# Altium PCB PCB_EDR Project.pcbdoc
Units mm, origin at the board's own origin, x right, y up, seen from the top; angles counter-clockwise.
Board outline 72.49 x 57.84 mm, 2 copper layers (Top Layer, Bottom Layer); 27 components, 23 nets, 96 pads, 2 vias.
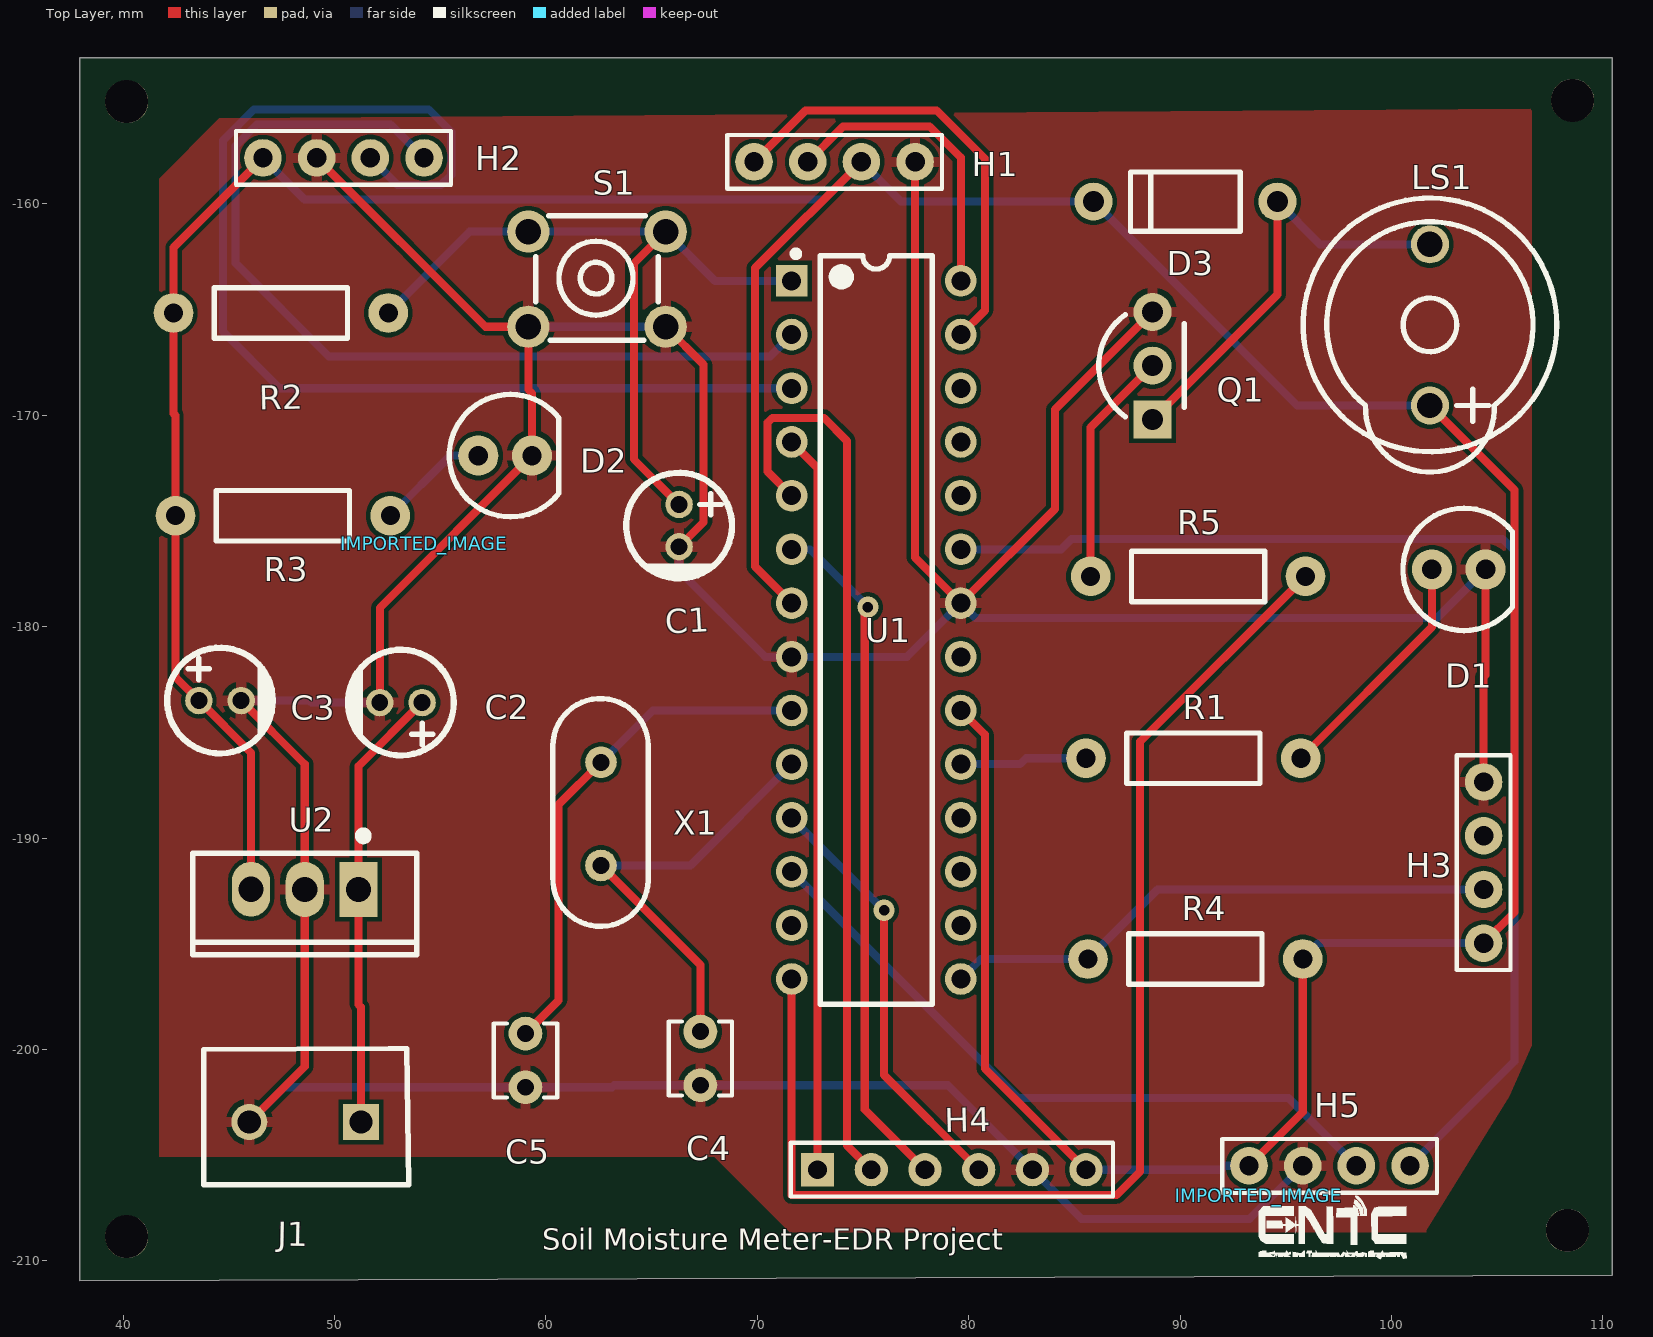
[diagram p0: Top Layer view]
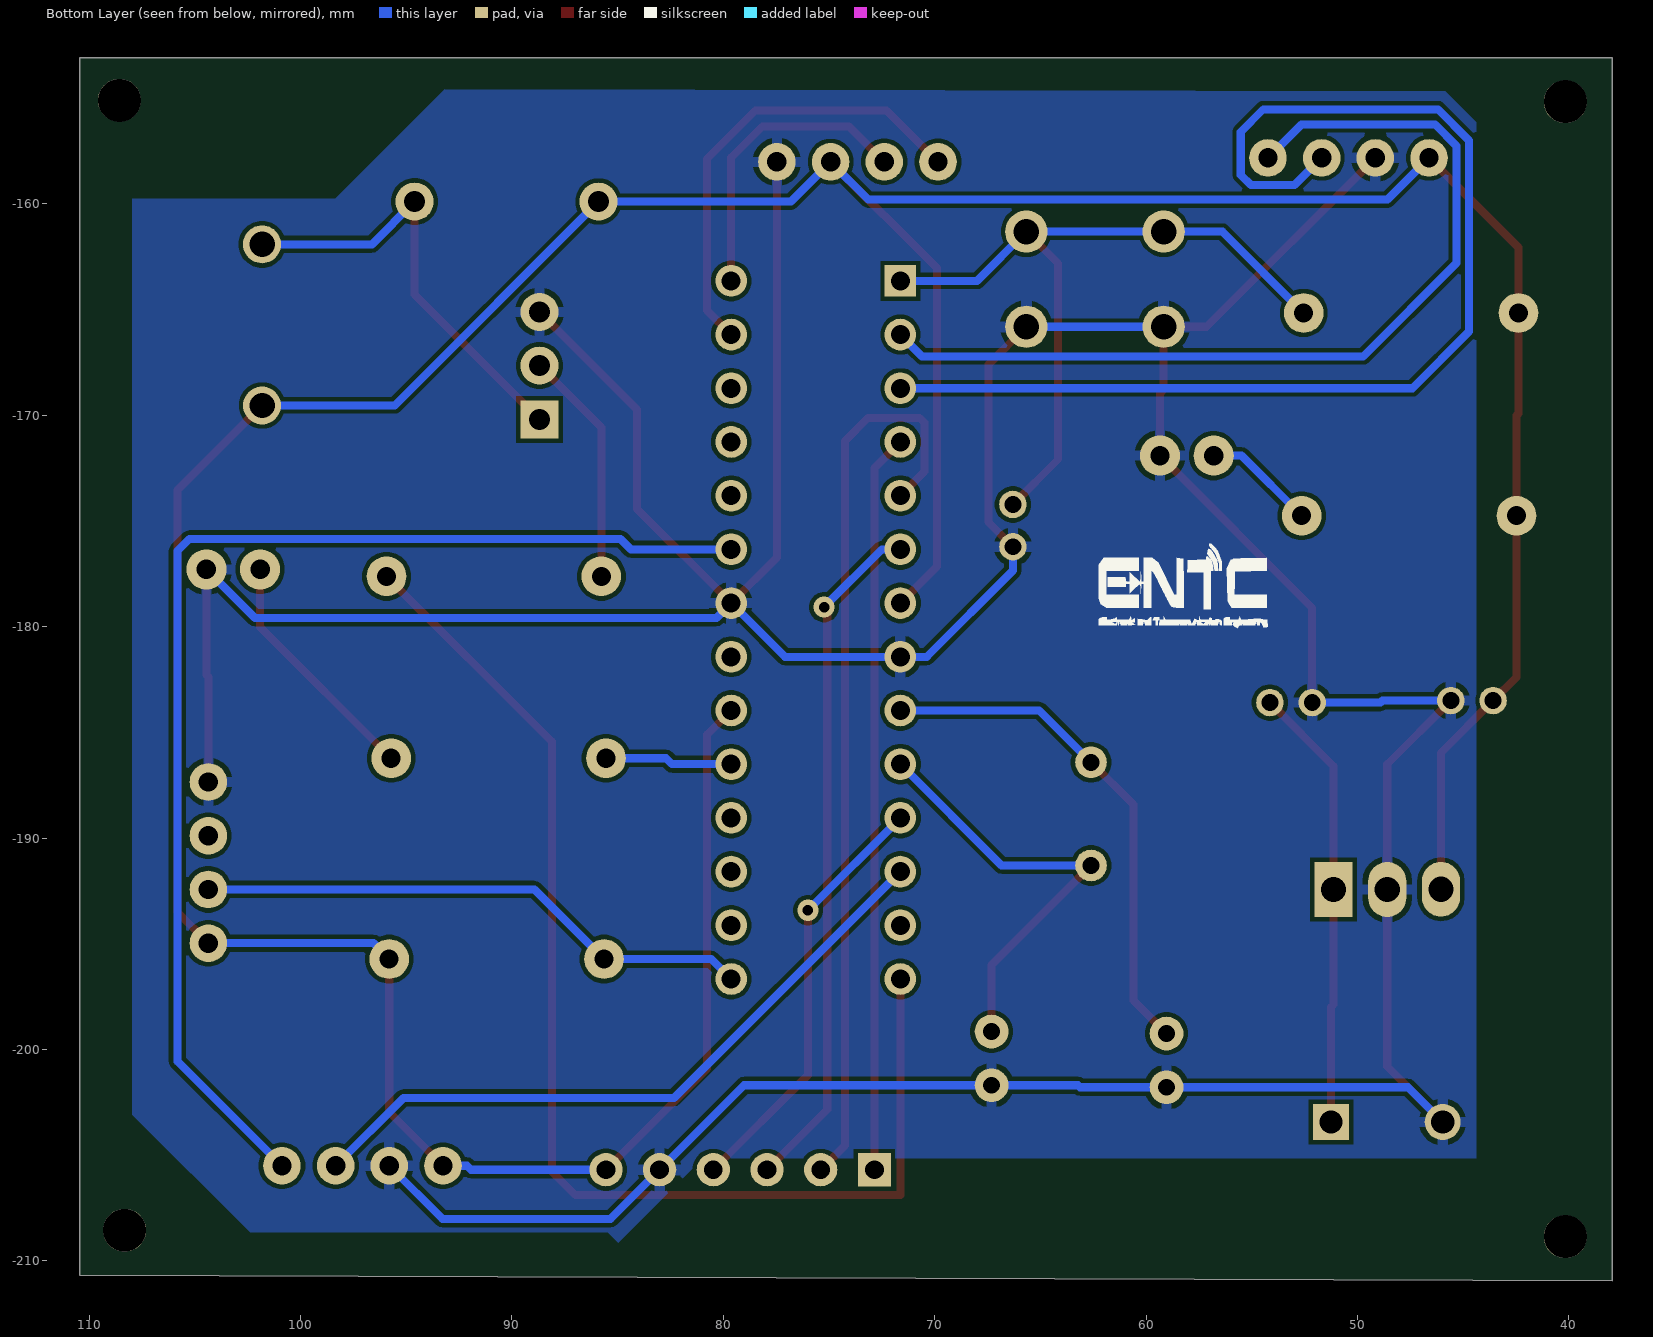
[diagram p1: Bottom Layer view, seen from below]

## Layer stack, top to bottom
Top Solder: solder mask 0.0102, Solder Resist, Dk 3.5
Top Layer: signal copper 0.0356
Dielectric1: dielectric 0.32, FR-4, Dk 4.8
Bottom Layer: signal copper 0.0356
Bottom Solder: solder mask 0.0102, Solder Resist, Dk 3.5

## Board outline
37.953,-210.93 37.953,-153.09 110.44,-153.09 110.44,-210.686

## Design rules (kind name [scope] priority, off if disabled: settings)
BoardOutlineClearance [All] p1: gap=0.2 ignorepadtopadclearanceinfootprint=FALSE except(0.4: Arc-SplitBarrior Arc-SplitContinuation Track-SplitBarrior Track-SplitContinuation SMDPad-SplitBarrior SMDPad-SplitContinuation THPad-SplitBarrior THPad-SplitContinuation Via-SplitBarrior Via-SplitContinuation Fill-SplitBarrior Fill-SplitContinuation Poly-SplitBarrior Poly-SplitContinuation Region-SplitBarrior Region-SplitContinuation Text-SplitBarrior Text-SplitContinuation)
Clearance "Clearance Bottom Layer" [OnLayer('Bottom Layer')] p1: gap=0.203 ignorepadtopadclearanceinfootprint=TRUE except(0.254: Arc-Text Track-Text SMDPad-Text THPad-Text Via-Text Fill-Text Poly-Text Region-Text Text-Text)
Clearance "Clearance Top Layer" [OnLayer('Top Layer')] p2: gap=0.203 ignorepadtopadclearanceinfootprint=TRUE except(0.254: Arc-Text Track-Text SMDPad-Text THPad-Text Via-Text Fill-Text Poly-Text Region-Text Text-Text)
Clearance [All] p3: gap=0.2 ignorepadtopadclearanceinfootprint=FALSE except(0.089: Arc-Arc Arc-Track Arc-SMDPad Track-Track Track-SMDPad SMDPad-SMDPad; 0.127: Arc-Via Track-Via SMDPad-Via THPad-Via Via-Via; 0.254: Arc-Text Track-Text SMDPad-Text THPad-Text Via-Text Fill-Text Poly-Text Region-Text Text-Text)
HoleSize [All] p1: absolutevalues=TRUE maxlimit=6.3 minlimit=0.2 maxpercent=80.000 minpercent=20.000
MinimumAnnularRing [All] p1: minimumring=0.076
MinimumSolderMaskSliver [All] p1: minsoldermaskwidth=0.1
PolygonConnect PolygonConnect_1 [All] p1: thpad.connectstyle=Relief thpad.reliefconductorwidth=0.508 thpad.reliefentries=4 thpad.polygonreliefangle="90 Angle" thpad.airgapwidth=0.254 smdpad.connectstyle=Relief smdpad.reliefconductorwidth=0.508 smdpad.reliefentries=4 smdpad.polygonreliefangle="90 Angle" smdpad.airgapwidth=0.254 via.connectstyle=Direct via.reliefconductorwidth=0.508 via.reliefentries=4 via.polygonreliefangle="90 Angle" via.airgapwidth=0.254
RoutingCorners [All] p1: cornerstyle=Round minsetback=2.54 maxsetback=2.54
RoutingVias [All] p1: holewidth=0.5 width=1 viastyle="Through Hole" minholewidth=0.2 minwidth=0.45 maxholewidth=1 maxwidth=2
SilkToSilkClearance [All] p1: silktosilkclearance=0.1
SilkToSolderMaskClearance [IsPad] p1: minsilkscreentomaskgap=0.01 clearancetoexposedcopper=TRUE
SolderMaskExpansion [All] p1: expansion=0.102 istentingtop=FALSE
Width [All] p1: maxlimit=2.54 minlimit=0.089 preferedwidth=0.381
25 further rules are at their usual default settings.

## Components (designator, comment, footprint, x,y, rotation, side; value= is the part's Value field where it differs from the comment)
C1 "0.1uF" CAP-TH_BD5.0-P2.00-D0.8-FD 66.302,-175.22 r270 top
C2 "0.33uF" CAP-TH_BD5.0-P2.00-D0.8-FD 53.145,-183.591 r180 top
C3 "0.1uF" CAP-TH_BD5.0-P2.00-D0.8-FD 44.589,-183.497 r0 top
C4 "22pF" CAP-TH_L3.5-W3.0-P2.54-D0.8 67.309,-200.421 r270 top
C5 "22pF" CAP-TH_L3.5-W3.0-P2.54-D0.8 59.034,-200.515 r270 top
D1 "LED" "5MM LED" 101.908,-177.291 r0 top
D2 "LED" "5MM LED" 56.806,-171.91 r0 top
D3 "1N4001" DO-41_BD2.4-L4.7-P8.70-D0.9-RD 90.25,-159.897 r0 top
H1 "4-PIN HEADER" "HEADER - HEADER-FEMALE-2.54_1X4" 72.384,-158.016 r0 top
H2 "4-PIN HEADER" "HEADER - HEADER-FEMALE-2.54_1X4" 51.699,-157.828 r180 top
H3 "4-PIN HEADER" "HEADER - HEADER-FEMALE-2.54_1X4" 104.354,-192.429 r90 top
H4 "4-PIN HEADER" HDR-F-2.54_1X6 77.932,-205.686 r0 top
H5 "4-PIN HEADER" "HEADER - HEADER-FEMALE-2.54_1X4" 95.796,-205.498 r0 top
IMPORTED_IMAGE "Comment" IMPORTED_IMAGE 54.239,-176.069 r0 top
IMPORTED_IMAGE "Comment" IMPORTED_IMAGE 93.729,-206.909 r0 top
J1 "Power" CONN-TH_XHB-2A 51.23,-203.43 r0 top
LS1 "BUZZER" DIP-BUZZER-12X6 101.815,-165.726 r180 top
Q1 "BC547" TO-92-3_L4.9-W3.7-P2.54-L 88.695,-167.654 r90 top
R1 "330Ω" AXIAL-0.4 90.626,-186.224 r0 top
R2 "10KΩ" AXIAL-0.4 47.47,-165.162 r0 top
R3 "1KΩ" AXIAL-0.4 47.564,-174.753 r0 top
R4 "4.7kΩ" AXIAL-0.4 90.72,-195.72 r180 top
R5 "220Ω" AXIAL-0.4 90.848,-177.619 r180 top
S1 "Reset" KEY-TH_4P-L6.0-W6.0-P4.50 62.419,-163.564 r0 top
U1 "ATMEGA328P-PU" DIP-28_L34.6-W7.3-P2.54-LS10.2-BL 75.626,-180.154 r270 top
U2 "LM7805" TO-220-3_L10.0-W4.5-P2.54-L 48.596,-192.424 r180 top
X1 "16MHz" CRYSTAL-TH_L10.8-W4.5-P4.88 62.607,-188.856 r270 top

## Footprints (in the part's own frame and the unit in brackets; to place one, negate y for a bottom-side part, rotate by r counter-clockwise, add the part's x,y. Pads: shape width x height; smd on the part's side, far side on the other; paste and mask are expansions set on the pad)
"5MM LED" [mm]
  round 1.9 hole 0.914: 1(0,0) 2(2.54,0)
  silkscreen extent -1.37,-2.9 3.81,2.9
AXIAL-0.4 [mil]
  round 74 hole 35.4: 1(-200,0) 2(200,0)
  silkscreen extent -124,-47 124,47
CAP-TH_BD5.0-P2.00-D0.8-FD [mm]
  round 1.3 hole 0.8: 1(-1,0) 2(1,0)
  silkscreen extent -2.5,-2.5 2.5,2.5
CAP-TH_L3.5-W3.0-P2.54-D0.8 [mm]
  round 1.6 hole 0.8: 1(-1.27,0) 2(1.27,0)
  silkscreen extent -1.75,-1.5 1.75,1.5
CONN-TH_XHB-2A [mm]
  rect 1.7x1.7 hole 1.1: 1(0.025,0)
  round 1.7 hole 1.1: 2(-5.258,0)
  silkscreen extent -7.42,-2.97 2.29,3.48
CRYSTAL-TH_L10.8-W4.5-P4.88 [mm]
  round 1.5 hole 0.8: 1(-2.44,0) 2(2.44,0)
  silkscreen extent -5.46,-2.28 5.32,2.24
DIP-28_L34.6-W7.3-P2.54-LS10.2-BL [mm]
  rect 1.5x1.5 hole 0.9: 1(-16.51,-4)
  round 1.5 hole 0.9: 2(-13.97,-4) 3(-11.43,-4) 4(-8.89,-4) 5(-6.35,-4) 6(-3.81,-4) 7(-1.27,-4) 8(1.27,-4) 9(3.81,-4) 10(6.35,-4) 11(8.89,-4) 12(11.43,-4) 13(13.97,-4) 14(16.51,-4) 15(16.51,4) 16(13.97,4) 17(11.43,4) 18(8.89,4) 19(6.35,4) 20(3.81,4) 21(1.27,4) 22(-1.27,4) 23(-3.81,4) 24(-6.35,4) 25(-8.89,4) 26(-11.43,4) 27(-13.97,4) 28(-16.51,4)
  silkscreen extent -17.94,-3.95 17.7,2.65
DIP-BUZZER-12X6 [mm]
  round 1.8 hole 1.2: 1(0,3.81) 2(0,-3.81)
  silkscreen extent -6,-6 6,6.96
DO-41_BD2.4-L4.7-P8.70-D0.9-RD [mm]
  round 1.8 hole 1: 1(-4.35,0) 2(4.35,0)
  silkscreen extent -2.6,-1.4 2.6,1.4
HDR-F-2.54_1X6 [mil]
  rect 62x62 hole 35: 1(-200,0)
  round 62 hole 35: 2(-100,0) 3(0,0) 4(100,0) 5(200,0) 6(300,0)
  silkscreen extent -250,-50 350,50
"HEADER - HEADER-FEMALE-2.54_1X4" [mil]
  round 70 hole 36: 1(-100,0) 2(0,0) 3(100,0) 4(200,0)
  silkscreen extent -150,-50 250,50
IMPORTED_IMAGE [mm]
KEY-TH_4P-L6.0-W6.0-P4.50 [mm]
  round 2 hole 1.2: 1(-3.25,-2.25) 2(3.25,-2.25) 3(3.25,2.25) 4(-3.25,2.25)
  silkscreen extent -2.9,-2.9 2.9,3
TO-92-3_L4.9-W3.7-P2.54-L [mm]
  rect 1.8x1.8 hole 1: 1(-2.54,0)
  round 1.8 hole 1: 2(0,0) 3(2.54,0)
  silkscreen extent -2.41,-1.5 2.41,2.54
TO-220-3_L10.0-W4.5-P2.54-L [mm]
  rect 1.8x2.6 hole 1.2: 1(-2.54,0.005)
  oval 1.8x2.6 hole 1.2: 2(0,0.005) 3(2.54,-0.005)
  silkscreen extent -5.3,-2.73 5.3,3.09

## Free pads (board coordinates)
  round 2.032 hole 2.032 unplated: ""(40.173,-208.853) ""(40.173,-155.168) ""(108.317,-208.548) ""(108.561,-155.107)

## Via types
v1: diameter 1, hole 0.5, Top Layer to Bottom Layer, 2 vias

## Nets (pads, with @x,y where several pads share a name; then routed paths per layer and width w, separated by ;. In a path a pad name is that pad's centre, name@x,y a point inside that pad or via, vN(x,y) a via of type N, cw(c..) or ccw(c..) an arc to the next point about the centre after c; other vN are vias at no path point)
5V: C3.1 D3.1 H1.3 H2.4 H3.1 H4.6 H5.1 LS1.1 R2.1 R3.1 R4.1 U1.7 U1.20 U2.3 | length 202.4
  Top Layer w0.381: U2.3 46.056,-185.964 C3.1 42.484,-182.391 R3.1 42.484,-170.009 42.39,-169.915 R2.1 42.39,-162.058 H2.4 ; U1.7 69.898,-177.156 69.898,-163.043 H1.3 ; U1.20 80.772,-185.111 80.772,-200.907 H4.6 ; H5.1 95.8,-202.954 R4.1 ; LS1.1 105.816,-173.538 105.816,-193.507 H3.1
  Bottom Layer w0.381: H2.4 48.589,-159.798 73.143,-159.798 H1.3 76.805,-159.897 D3.1 95.54,-169.536 LS1.1 ; H4.6 91.936,-205.686 92.124,-205.498 H5.1 ; R4.1 96.551,-194.969 H3.1
BUT1: H4.1 U1.4 | length 34.9
  Top Layer w0.381: U1.4 72.852,-172.49 H4.1
BUT2: H4.2 U1.5 | length 43.2
  Top Layer w0.381: U1.5 70.482,-172.661 70.482,-170.352 70.714,-170.121 73.152,-170.121 74.244,-171.213 74.244,-204.539 H4.2
BUT3: H4.3 U1.6 | length 32.6
  Top Layer w0.381: v1(75.235,-179.076) 75.082,-179.229 75.082,-202.837 H4.3
  Bottom Layer w0.381: U1.6 72.503,-176.344 v1(75.235,-179.076)
BUT4: H4.4 U1.11 | length 20.3
  Top Layer w0.381: v1(75.997,-193.415) 75.997,-201.211 H4.4
  Bottom Layer w0.381: U1.11 v1(75.997,-193.415)
BUZZER: R5.1 U1.14 | length 58.6
  Top Layer w0.381: U1.14 71.626,-206.889 86.995,-206.889 88.113,-205.772 88.113,-185.435 R5.1
D1_1: D1.1 R1.2 | length 11.5
  Top Layer w0.381: R1.2 101.908,-180.022 D1.1
DHT11: H3.2 R4.2 U1.15 | length 26.5
  Bottom Layer w0.381: U1.15 80.57,-195.72 R4.2 88.931,-192.429 H3.2
GND: C1.2 C2.2 C3.2 C4.2 C5.2 D1.2 D2.2 H1.4 H2.3 H3.4 H4.5 H5.2 J1.2 Q1.3 S1.1 S1.2 U1.8 U1.22 U2.2 | length 228
  Top Layer w0.381: C3.2 48.596,-186.504 U2.2 48.596,-200.806 J1.2 ; H2.3 57.145,-165.814 S1.1 59.169,-168.79 59.346,-168.967 D2.2 52.145,-179.111 C2.2 ; S1.2 67.462,-167.607 67.462,-175.06 C1.2 ; H1.4 77.464,-176.723 U1.22 84.074,-174.436 84.074,-169.734 Q1.3 ; H3.4 104.354,-182.378 104.448,-182.284 D1.2
  Bottom Layer w0.381: C3.2 48.819,-183.497 48.913,-183.591 C2.2 ; J1.2 47.617,-201.785 C5.2 63.119,-201.785 63.213,-201.691 C4.2 79.017,-201.691 H4.5 85.332,-208.007 93.288,-208.007 H5.2 ; S1.1 S1.2 ; C1.2 66.302,-177.349 70.377,-181.424 U1.8 77.086,-181.424 U1.22 80.326,-179.584 102.155,-179.584 D1.2
MOISTURESENSOR: H5.4 U1.23 | length 57.8
  Bottom Layer w0.381: U1.23 84.368,-176.344 84.861,-175.851 105.258,-175.851 105.816,-176.409 105.816,-200.558 H5.4
MOISTURESENSOR-D: H5.3 U1.12 | length 32.5
  Bottom Layer w0.381: U1.12 82.333,-202.292 95.13,-202.292 H5.3
OSC1: C5.1 U1.9 X1.1 | length 24.3
  Top Layer w0.381: C5.1 60.604,-197.675 60.604,-188.419 X1.1
  Bottom Layer w0.381: X1.1 65.059,-183.964 U1.9
OSC2: C4.1 U1.10 X1.2 | length 20.8
  Top Layer w0.381: X1.2 67.309,-195.997 C4.1
  Bottom Layer w0.381: X1.2 66.834,-191.296 U1.10
Q1_1: D3.2 LS1.2 Q1.1 | length 20.8
  Top Layer w0.381: Q1.1 94.6,-164.288 D3.2
  Bottom Layer w0.381: D3.2 96.62,-161.916 LS1.2
R1_1: R1.1 U1.19 | length 6
  Bottom Layer w0.381: U1.19 82.423,-186.504 82.704,-186.224 R1.1
R3_2: D2.1 R3.2 | length 5.3
  Bottom Layer w0.381: R3.2 55.486,-171.91 D2.1
R5_2: Q1.2 R5.2 | length 11.2
  Top Layer w0.381: R5.2 85.768,-170.58 Q1.2
RX: H2.1 U1.2 | length 44.1
  Bottom Layer w0.381: H2.1 52.653,-156.242 46.33,-156.242 45.314,-157.258 45.314,-162.795 49.733,-167.215 70.595,-167.215 U1.2
S1_3: C1.1 R2.2 S1.3 S1.4 U1.1 | length 36.1
  Top Layer w0.381: S1.3 64.16,-162.823 64.16,-172.078 C1.1
  Bottom Layer w0.381: R2.2 56.398,-161.314 S1.4 S1.3 68,-163.644 U1.1
SCL: H1.2 U1.28 | length 14.4
  Top Layer w0.381: H1.2 74.058,-156.343 78.156,-156.343 79.626,-157.813 U1.28
SDA: H1.1 U1.27 | length 21.7
  Top Layer w0.381: H1.1 72.28,-155.581 78.486,-155.581 80.772,-157.867 80.772,-165.038 U1.27
TX: H2.2 U1.3 | length 55.5
  Bottom Layer w0.381: H2.2 52.983,-159.112 55.042,-159.112 55.524,-158.629 55.524,-156.597 54.458,-155.531 46.203,-155.531 44.729,-157.004 44.729,-166.046 47.408,-168.724 U1.3
VCC: C2.1 J1.1 U2.1 | length 21.1
  Top Layer w0.381: J1.1 51.256,-197.999 51.136,-197.88 U2.1 51.136,-186.6 C2.1
pads on no net: H3.3 U1.13 U1.16 U1.17 U1.18 U1.21 U1.24 U1.25 U1.26

## Polygon pours and split planes (outlines as drawn)
GND on Bottom Layer "GND_L02_P006" (solid, remove dead copper, pour order 6): 45.858,-154.681 44.392,-156.148 44.392,-205.134 80.96,-205.134 84.969,-209.143 85.458,-208.654 102.373,-208.654 107.947,-203.081 107.947,-159.765 98.365,-159.765 93.182,-154.583
GND on Top Layer "GND_L01_P002" (solid, remove dead copper, pour order 2): 44.564,-155.951 41.705,-158.809 41.705,-205.076 67.965,-205.076 71.538,-208.649 101.638,-208.649 101.638,-208.56 105.569,-202.218 106.64,-199.806 106.64,-155.504

## Silkscreen, mask and mechanical layers (free items; w line width, h text height)
Top Overlay:
  text "Soil Moisture Meter-EDR Project" at 59.837,-209.476 h1